# Altium PCB 对射式传感器_计数传感器.PcbDoc
Units mm, origin at the board's own origin, x right, y up, seen from the top; angles counter-clockwise.
Board outline 152.4 x 101.6 mm, 2 copper layers (Top Layer, Bottom Layer); 16 components, 7 nets, 45 pads, 2 vias.
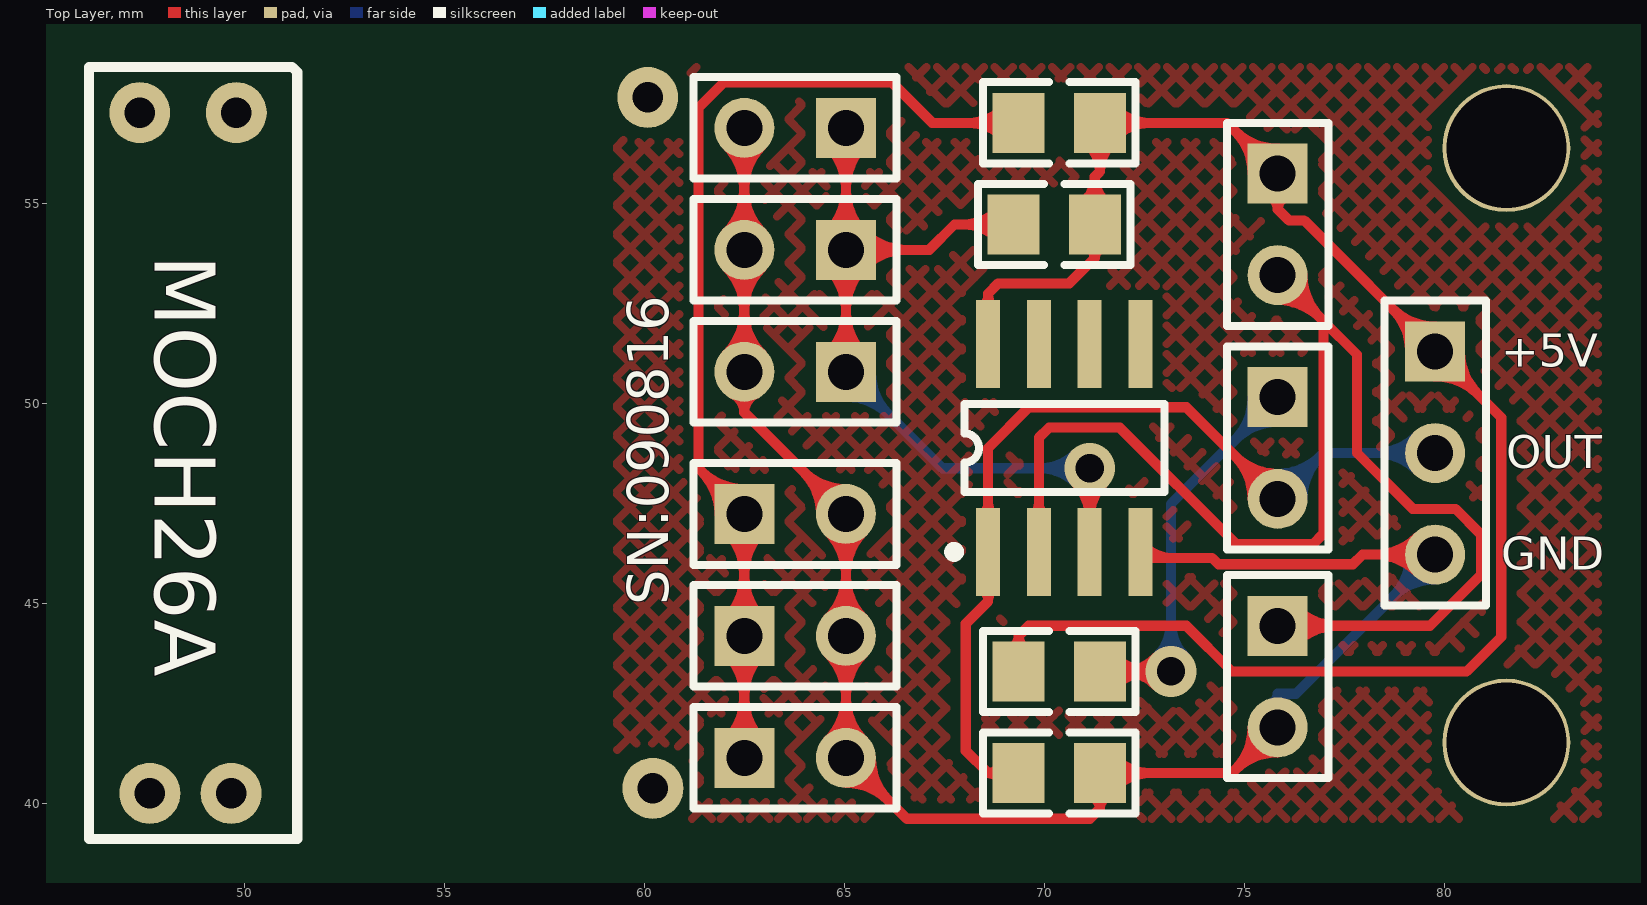
[diagram p0: Top Layer view]
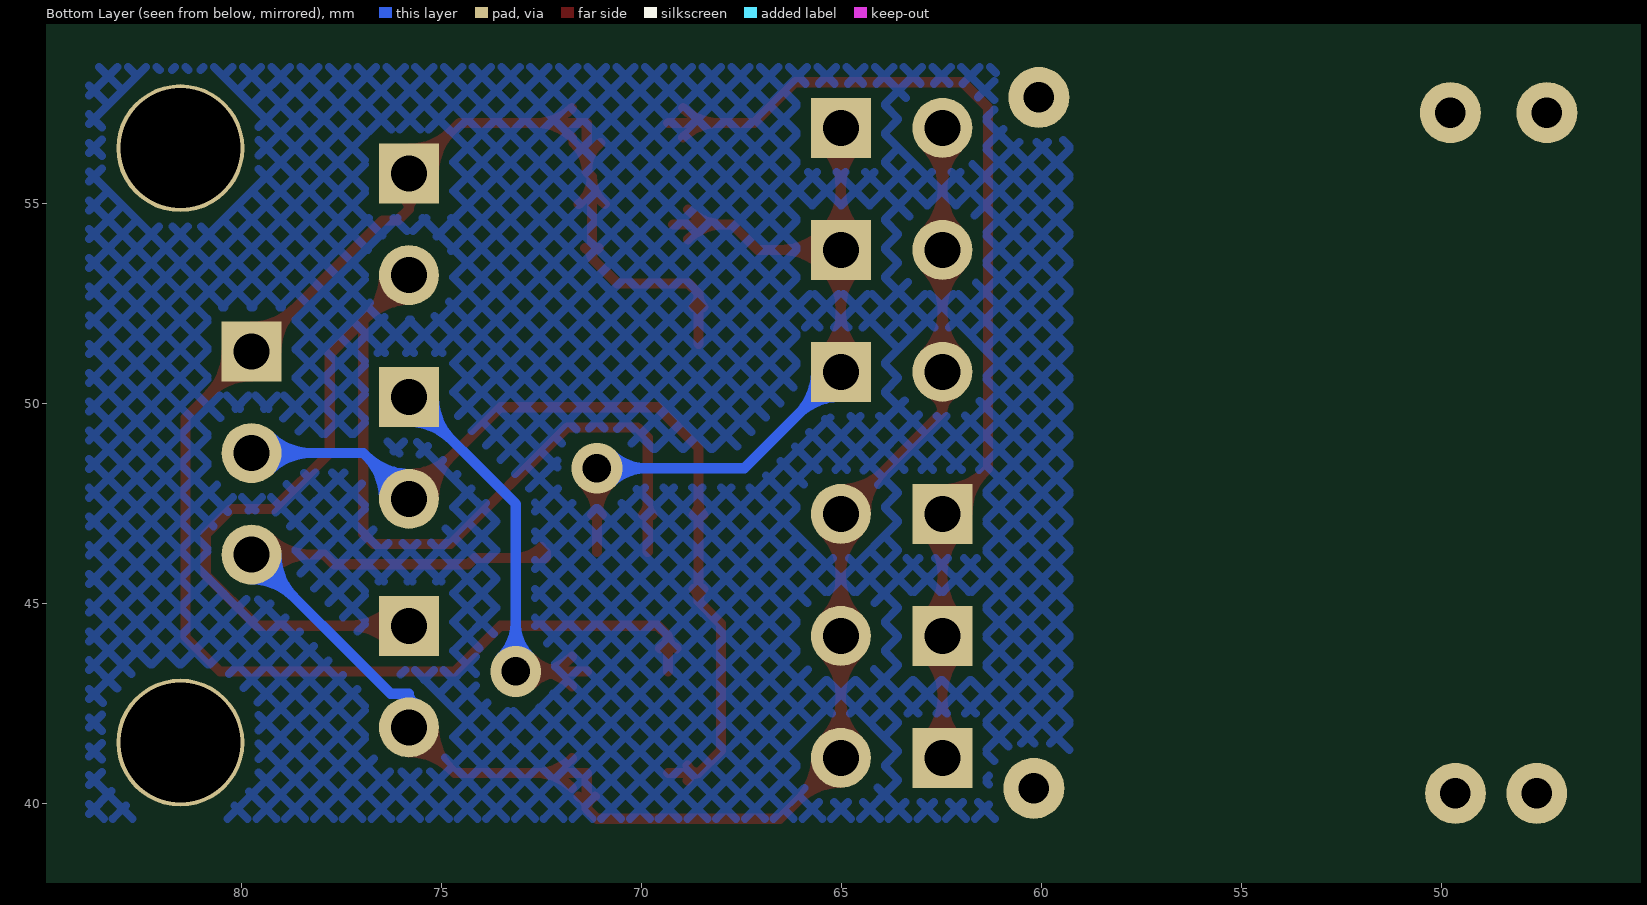
[diagram p1: Bottom Layer view, seen from below]

## Layer stack, top to bottom
Top Layer: signal copper 0.0356
Dielectric: dielectric 0.32, FR-4, Dk 4.8
Bottom Layer: signal copper 0.0356

## Board outline
25.4,25.4 177.8,25.4 177.8,127 25.4,127

## Design rules (kind name [scope] priority, off if disabled: settings)
Clearance [All] p1: gap=0.254
ComponentClearance [All] p1: gap=0.254 collisioncheckmode=3 verticalgap=0.254
PolygonConnect [All] p1: connectstyle=Relief reliefconductorwidth=0.254 reliefentries=4 polygonreliefangle="90 Angle"
RoutingVias [All] p1: holewidth=0.711 width=1.27 viastyle="Through Hole" minholewidth=0.711 minwidth=1.27 maxholewidth=0.711 maxwidth=1.27
SolderMaskExpansion [All] p1: expansion=0.102
TestPointUsage [All] p1: valid=0 allowmultiple=FALSE
Testpoint [All] p1: side=15 testpointundercomponent=TRUE minsize=1.016 maxsize=2.54 preferedsize=1.524 minholesize=0 maxholesize=1.016 preferedholesize=0.813 testpointgrid=0.025 style=1023 order=0-112345678
Width [All] p1: maxlimit=0.254 minlimit=0.254 preferedwidth=0.254
17 further rules are at their usual default settings.

## Components (designator, comment, footprint, x,y, rotation, side; value= is the part's Value field where it differs from the comment)
+5V "Header 3" HDR1X3 79.756,51.308 r270 top (schematic designator JP1)
C1 "" TP-0805-R 67.818,42.037 r180 top
GND "" HDR1X2 75.819,50.165 r270 top (schematic designator LED1)
JX-359F1 "" HDR1X2 62.484,41.148 r0 top
JX-359F1 "" HDR1X2 62.484,44.196 r0 top
JX-359F1 "" HDR1X2 62.484,47.244 r0 top
JX-359F2 "" HDR1X2 65.024,56.896 r180 top
JX-359F2 "" HDR1X2 65.024,53.848 r180 top
JX-359F2 "" HDR1X2 65.024,50.8 r180 top
LED1 "" HDR1X2 75.819,44.45 r270 top
MOCH26A "传感器" MOCH26A 47.752,41.148 r180 top
OUT "" HDR1X2 75.819,55.753 r270 top (schematic designator LED1)
R1 "" TP-0805-R 72.898,55.753 r0 top
R2 "" TP-0805-R 72.771,53.213 r0 top
R4 "" TP-0805-R 67.818,44.577 r180 top
U1 "LM393AD" SO8 70.485,48.895 r0 top

## Footprints (in the part's own frame and the unit in brackets; to place one, negate y for a bottom-side part, rotate by r counter-clockwise, add the part's x,y. Pads: shape width x height; smd on the part's side, far side on the other; paste and mask are expansions set on the pad)
HDR1X2 [mm] "Connector; Header; 2 Position"
  rect 1.5x1.5 hole 0.9: 1(0,0)
  round 1.5 hole 0.9: 2(2.54,0)
  silkscreen extent -1.27,-1.27 3.81,1.27
HDR1X3 [mm] "Connector; Header; 3 Position"
  rect 1.5x1.5 hole 0.9: 1(0,0)
  round 1.5 hole 0.9: 2(2.54,0) 3(5.08,0)
  silkscreen extent -1.27,-1.27 6.35,1.27
MOCH26A [mil]
  round 60 hole 30: 1(5,35) 2(-75,35) 3(-80,-635) 4(15,-635)
  silkscreen extent -140,-680 65,80
SO8 [mm] "Small Outline; 8 Leads; Body Width 3.9 mm; Pitch 1.27 mm"
  rect 0.6x2.2 smd: 1(-1.905,-2.6) 2(-0.635,-2.6) 3(0.635,-2.6) 4(1.905,-2.6) 5(1.905,2.6) 6(0.635,2.6) 7(-0.635,2.6) 8(-1.905,2.6)
  silkscreen extent -2.88,-2.72 2.5,1.1
TP-0805-R [mm] "贴片0805"
  rect 1.3x1.5 smd: 1(-3.556,1.27) 2(-1.524,1.27)
  silkscreen extent -4.44,0.25 -0.64,2.29

## Part data
+5V: "Header, 3-Pin"
C1: library part "Cap Semi", "Capacitor (Semiconductor SIM Model)"
GND JX-359F1 JX-359F1 JX-359F1 LED1 OUT: library part LED3, "Typical BLUE SiC LED"
JX-359F2 JX-359F2 JX-359F2: library part "Photo Sen", "Photosensitive Diode"
R1 R2 R4: library part Res2, "Resistor"
U1: "Low-Power Dual Voltage Comparator"

## Free pads (board coordinates)
  round 3.2 hole 3: 0(81.534,41.529) 0(81.534,56.388)
  round 1.524 hole 0.762: 2(60.071,57.658) 3(60.198,40.386)

## Via types
v1: diameter 1.27, hole 0.711, Top Layer to Bottom Layer, 2 vias

## Nets (pads, with @x,y where several pads share a name; then routed paths per layer and width w, separated by ;. In a path a pad name is that pad's centre, name@x,y a point inside that pad or via, vN(x,y) a via of type N, cw(c..) or ccw(c..) an arc to the next point about the centre after c; other vN are vias at no path point)
GND: +5V.3 C1.1 JX-359F1.2 JX-359F2.2 LED1.2 U1.4 | length 97.8
  Top Layer w0.254: JX-359F2.2@62.043,51.241 ccw(c60.98,52.304) 62.484,52.304 ccw(c63.988,52.304) JX-359F2.2@62.925,51.241 ; JX-359F2.2@62.043,53.407 cw(c60.98,52.344) 62.484,52.344 cw(c63.988,52.344) JX-359F2.2@62.925,53.407 ; JX-359F2.2@62.043,54.289 ccw(c60.98,55.352) 62.484,55.352 ccw(c63.988,55.352) JX-359F2.2@62.925,54.289 ; JX-359F2.2@62.043,56.455 cw(c60.98,55.392) 62.484,55.392 cw(c63.988,55.392) JX-359F2.2@62.925,56.455 ; JX-359F2.2@62.201,50.245 cw(c61.967,49.784) 62.484,49.784 ; JX-359F2.2@62.223,51.061 ccw(c61.593,51.691) 62.484,51.691 ccw(c63.375,51.691) JX-359F2.2@62.745,51.061 ; JX-359F2.2@62.223,53.587 cw(c61.593,52.957) 62.484,52.957 cw(c63.375,52.957) JX-359F2.2@62.745,53.587 ; JX-359F2.2@62.223,54.109 ccw(c61.593,54.739) 62.484,54.739 ccw(c63.375,54.739) JX-359F2.2@62.745,54.109 ; JX-359F2.2@62.223,56.635 cw(c61.593,56.005) 62.484,56.005 cw(c63.375,56.005) JX-359F2.2@62.745,56.635 ; JX-359F2.2@62.484,56.896 62.484,53.848 62.484,50.8 62.484,49.784 ; JX-359F2.2@62.767,50.245 ccw(c63.001,49.784) 62.484,49.784 ; JX-359F1.2@64.401,47.244 ccw(c62.897,47.244) 63.96,48.308 ccw(c65.024,49.371) JX-359F1.2@65.024,47.867 ; JX-359F1.2@64.583,41.589 ccw(c63.52,42.652) 65.024,42.652 ccw(c66.528,42.652) JX-359F1.2@65.465,41.589 ; JX-359F1.2@64.583,43.755 cw(c63.52,42.692) 65.024,42.692 cw(c66.528,42.692) JX-359F1.2@65.465,43.755 ; JX-359F1.2@64.583,44.637 ccw(c63.52,45.7) 65.024,45.7 ccw(c66.528,45.7) JX-359F1.2@65.465,44.637 ; JX-359F1.2@64.583,46.803 cw(c63.52,45.74) 65.024,45.74 cw(c66.528,45.74) JX-359F1.2@65.465,46.803 ; JX-359F1.2@64.655,47.244 ccw(c63.764,47.244) 64.394,47.874 ccw(c65.024,48.504) JX-359F1.2@65.024,47.613 ; JX-359F1.2@64.763,41.409 ccw(c64.133,42.039) 65.024,42.039 ccw(c65.915,42.039) JX-359F1.2@65.285,41.409 ; JX-359F1.2@64.763,43.935 cw(c64.133,43.305) 65.024,43.305 cw(c65.915,43.305) JX-359F1.2@65.285,43.935 ; JX-359F1.2@64.763,44.457 ccw(c64.133,45.087) 65.024,45.087 ccw(c65.915,45.087) JX-359F1.2@65.285,44.457 ; JX-359F1.2@64.763,46.983 cw(c64.133,46.353) 65.024,46.353 cw(c65.915,46.353) JX-359F1.2@65.285,46.983 ; JX-359F1.2@65.024,40.525 cw(c65.024,39.021) 66.088,40.084 cw(c67.151,41.148) JX-359F1.2@65.647,41.148 ; JX-359F1.2@65.024,40.779 cw(c65.024,39.888) 65.654,40.518 cw(c66.284,41.148) JX-359F1.2@65.393,41.148 ; C1.1@71.17,40.185 cw(c71.04,39.878) 71.374,39.878 ; C1.1@71.578,40.185 ccw(c71.708,39.878) 71.374,39.878 ; C1.1@71.744,40.397 cw(c72.637,39.504) 72.637,40.767 cw(c72.637,42.03) C1.1@71.744,41.137 ; U1.4 72.39,46.146 74.18,46.146 74.34,45.986 77.697,45.986 77.939,46.228 +5V.3 ; U1.4@72.512,46.417 ccw(c73.168,47.073) 73.168,46.146 ; LED1.2@75.196,41.91 cw(c73.692,41.91) 74.755,40.846 cw(c75.819,39.783) LED1.2@75.819,41.287 ; LED1.2@75.45,41.91 cw(c74.559,41.91) 75.189,41.28 cw(c75.819,40.65) LED1.2@75.819,41.541 ; LED1.2 74.676,40.767 C1.1 71.374,39.878 ; +5V.3@79.315,45.787 ccw(c78.252,44.724) 78.252,46.228 ccw(c78.252,47.732) +5V.3@79.315,46.669 ; +5V.3@79.495,45.967 ccw(c78.865,45.337) 78.865,46.228 ccw(c78.865,47.119) +5V.3@79.495,46.489 ; 62.484,49.784 65.024,47.244 65.024,44.196 65.024,41.148 66.548,39.624 71.12,39.624 71.374,39.878
  Bottom Layer w0.254: LED1.2@75.639,42.507 ccw(c75.567,42.748) 75.819,42.748 ; LED1.2 75.819,42.748 ; LED1.2@75.999,42.507 cw(c76.071,42.748) 75.819,42.748 ; +5V.3@79.133,46.228 cw(c77.629,46.228) 78.692,45.164 cw(c79.756,44.101) +5V.3@79.756,45.605 ; +5V.3@79.387,46.228 cw(c78.496,46.228) 79.126,45.598 cw(c79.756,44.968) +5V.3@79.756,45.859 ; +5V.3 76.276,42.748 75.819,42.748
NetC1_2: +5V.2 C1.2 GND.2 U1.1 | length 35.7
  Top Layer w0.254: U1.1@68.458,45.373 cw(c68.162,45.077) 68.58,45.077 cw(c68.998,45.077) U1.1@68.702,45.373 ; U1.1@68.458,47.217 ccw(c68.162,47.513) 68.58,47.513 ccw(c68.998,47.513) U1.1@68.702,47.217 ; C1.2@68.854,40.579 ccw(c68.58,40.473) 68.58,40.767 ; C1.2@68.854,40.955 cw(c68.58,41.061) 68.58,40.767 ; C1.2 68.58,40.767 ; GND.2@75.196,47.625 ccw(c73.692,47.625) 74.755,48.689 ccw(c75.819,49.752) GND.2@75.819,48.248 ; GND.2@75.45,47.625 ccw(c74.559,47.625) 75.189,48.255 ccw(c75.819,48.885) GND.2@75.819,47.994 ; GND.2 73.533,49.911 69.596,49.911 68.58,48.895 U1.1 68.58,45.06 68.021,44.501 68.021,41.326 68.58,40.767
  Bottom Layer w0.254: GND.2 76.962,48.768 +5V.2 ; GND.2@75.819,47.994 ccw(c75.819,48.885) 76.449,48.255 ccw(c77.079,47.625) GND.2@76.188,47.625 ; GND.2@75.819,48.248 ccw(c75.819,49.752) 76.883,48.689 ccw(c77.946,47.625) GND.2@76.442,47.625 ; +5V.2@79.315,48.327 ccw(c78.252,47.264) 78.252,48.768 ccw(c78.252,50.272) +5V.2@79.315,49.209 ; +5V.2@79.495,48.507 ccw(c78.865,47.877) 78.865,48.768 ccw(c78.865,49.659) +5V.2@79.495,49.029
NetJX-359F1_1: JX-359F1.1 R1.1 | length 46.2
  Top Layer w0.254: JX-359F1.1@61.861,47.244 ccw(c60.357,47.244) 61.42,48.308 ccw(c62.484,49.371) JX-359F1.1@62.484,47.867 ; JX-359F1.1@62.043,41.589 ccw(c60.98,42.652) 62.484,42.652 ccw(c63.988,42.652) JX-359F1.1@62.925,41.589 ; JX-359F1.1@62.043,43.755 cw(c60.98,42.692) 62.484,42.692 cw(c63.988,42.692) JX-359F1.1@62.925,43.755 ; JX-359F1.1@62.043,44.637 ccw(c60.98,45.7) 62.484,45.7 ccw(c63.988,45.7) JX-359F1.1@62.925,44.637 ; JX-359F1.1@62.043,46.803 cw(c60.98,45.74) 62.484,45.74 cw(c63.988,45.74) JX-359F1.1@62.925,46.803 ; JX-359F1.1@62.115,47.244 ccw(c61.224,47.244) 61.854,47.874 ccw(c62.484,48.504) JX-359F1.1@62.484,47.613 ; JX-359F1.1@62.223,41.409 ccw(c61.593,42.039) 62.484,42.039 ccw(c63.375,42.039) JX-359F1.1@62.745,41.409 ; JX-359F1.1@62.223,43.935 cw(c61.593,43.305) 62.484,43.305 cw(c63.375,43.305) JX-359F1.1@62.745,43.935 ; JX-359F1.1@62.223,44.457 ccw(c61.593,45.087) 62.484,45.087 ccw(c63.375,45.087) JX-359F1.1@62.745,44.457 ; JX-359F1.1@62.223,46.983 cw(c61.593,46.353) 62.484,46.353 cw(c63.375,46.353) JX-359F1.1@62.745,46.983 ; JX-359F1.1@62.484,41.148 62.484,44.196 62.484,47.244 61.341,48.387 61.341,57.404 61.976,58.039 66.167,58.039 67.183,57.023 R1.1 ; R1.1@68.972,56.653 ccw(c68.079,55.76) 68.079,57.023 ccw(c68.079,58.286) R1.1@68.972,57.393
NetJX-359F2_1: JX-359F2.1 R2.1 U1.3 | length 48.8
  Top Layer w0.254: JX-359F2.1@64.583,51.241 ccw(c63.52,52.304) 65.024,52.304 ccw(c66.528,52.304) JX-359F2.1@65.465,51.241 ; JX-359F2.1@64.583,53.407 cw(c63.52,52.344) 65.024,52.344 cw(c66.528,52.344) 65.465,53.407 cw(c66.528,52.344) 66.528,53.848 cw(c66.528,55.352) 65.465,54.289 cw(c66.528,55.352) 65.024,55.352 cw(c63.52,55.352) JX-359F2.1@64.583,54.289 ; JX-359F2.1@64.583,56.455 cw(c63.52,55.392) 65.024,55.392 cw(c66.528,55.392) JX-359F2.1@65.465,56.455 ; JX-359F2.1@64.763,51.061 ccw(c64.133,51.691) 65.024,51.691 ccw(c65.915,51.691) JX-359F2.1@65.285,51.061 ; JX-359F2.1@64.763,53.587 cw(c64.133,52.957) 65.024,52.957 cw(c65.915,52.957) 65.285,53.587 cw(c65.915,52.957) 65.915,53.848 cw(c65.915,54.739) 65.285,54.109 cw(c65.915,54.739) 65.024,54.739 cw(c64.133,54.739) JX-359F2.1@64.763,54.109 ; JX-359F2.1@64.763,56.635 cw(c64.133,56.005) 65.024,56.005 cw(c65.915,56.005) JX-359F2.1@65.285,56.635 ; JX-359F2.1@65.024,50.8 JX-359F2.1@65.024,53.848 ; JX-359F2.1@65.024,56.896 JX-359F2.1@65.024,53.848 ; R2.1@68.845,54.113 ccw(c67.952,53.22) 67.952,54.483 ccw(c67.952,55.746) R2.1@68.845,54.853 ; R2.1 67.742,54.483 67.107,53.848 JX-359F2.1@65.024,53.848 ; v1@70.761,48.028 cw(c69.894,47.161) 71.12,47.161 cw(c72.346,47.161) v1@71.479,48.028 ; U1.3@70.998,47.217 ccw(c70.702,47.513) 71.12,47.513 ccw(c71.538,47.513) U1.3@71.242,47.217 ; U1.3 v1(71.12,48.387)
  Bottom Layer w0.254: JX-359F2.1@65.024,50.177 cw(c65.024,48.673) 66.088,49.736 cw(c67.151,50.8) JX-359F2.1@65.647,50.8 ; JX-359F2.1@65.024,50.431 cw(c65.024,49.54) 65.654,50.17 cw(c66.284,50.8) JX-359F2.1@65.393,50.8 ; JX-359F2.1@65.024,50.8 67.437,48.387 v1(71.12,48.387) ; v1@70.761,48.028 ccw(c69.894,47.161) 69.894,48.387 ccw(c69.894,49.613) v1@70.761,48.746
NetLED1_1: GND.1 R4.1 | length 19.3
  Top Layer w0.254: R4.1 v1(73.152,43.307) ; R4.1@71.744,42.937 cw(c72.637,42.044) 72.637,43.307 cw(c72.637,44.57) R4.1@71.744,43.677 ; v1@72.793,42.948 ccw(c71.926,42.081) 71.926,43.307 ccw(c71.926,44.533) v1@72.793,43.666
  Bottom Layer w0.254: v1@72.793,43.666 ccw(c71.926,44.533) 73.152,44.533 ccw(c74.378,44.533) v1@73.511,43.666 ; v1(73.152,43.307) 73.152,47.498 GND.1 ; GND.1@75.196,50.165 cw(c73.692,50.165) 74.755,49.101 cw(c75.819,48.038) GND.1@75.819,49.542 ; GND.1@75.45,50.165 cw(c74.559,50.165) 75.189,49.535 cw(c75.819,48.905) GND.1@75.819,49.796
NetR3_3: LED1.1 OUT.2 U1.2 | length 40.7
  Top Layer w0.254: U1.2@69.728,47.217 ccw(c69.432,47.513) 69.85,47.513 ccw(c70.268,47.513) U1.2@69.972,47.217 ; U1.2 69.85,49.149 70.104,49.403 71.872,49.403 74.781,46.494 76.708,46.494 76.962,46.748 76.962,52.07 ; LED1.1 79.629,44.45 80.899,45.72 80.899,46.736 80.264,47.371 79.197,47.371 77.8,48.768 77.8,51.232 76.962,52.07 ; OUT.2@75.819,52.59 cw(c75.819,51.086) 76.883,52.149 cw(c77.946,53.213) OUT.2@76.442,53.213 ; OUT.2@75.819,52.844 cw(c75.819,51.953) 76.449,52.583 cw(c77.079,53.213) OUT.2@76.188,53.213 ; OUT.2 76.962,52.07 ; LED1.1@76.08,44.189 cw(c76.71,43.559) 76.71,44.45 cw(c76.71,45.341) LED1.1@76.08,44.711 ; LED1.1@76.26,44.009 cw(c77.323,42.946) 77.323,44.45 cw(c77.323,45.954) LED1.1@76.26,44.891
VCC: +5V.1 OUT.1 R1.2 R2.2 R4.2 U1.8 | length 60.1
  Top Layer w0.254: U1.8@68.458,52.417 ccw(c68.162,52.713) 68.58,52.713 ccw(c68.998,52.713) U1.8@68.702,52.417 ; U1.8 68.58,52.756 68.834,53.01 70.612,53.01 71.247,53.645 ; R4.2@69.138,43.889 ccw(c69.008,44.196) 69.342,44.196 ; R4.2 69.342,44.196 ; R4.2@69.546,43.889 cw(c69.676,44.196) 69.342,44.196 ; R2.2@70.919,54.99 ccw(c70.365,55.677) 71.247,55.677 ; R1.2@71.038,56.522 cw(c70.438,55.804) 71.374,55.804 ; R2.2@71.074,53.89 cw(c70.988,53.645) 71.247,53.645 ; R2.2@71.42,53.89 ccw(c71.506,53.645) 71.247,53.645 ; R2.2@71.575,54.99 cw(c72.129,55.677) 71.247,55.677 ; R1.2@71.71,56.522 ccw(c72.31,55.804) 71.374,55.804 ; R1.2@71.744,56.653 cw(c72.637,55.76) 72.637,57.023 cw(c72.637,58.286) R1.2@71.744,57.393 ; OUT.1@75.196,55.753 ccw(c73.692,55.753) 74.755,56.817 ccw(c75.819,57.88) OUT.1@75.819,56.376 ; OUT.1@75.45,55.753 ccw(c74.559,55.753) 75.189,56.383 ccw(c75.819,57.013) OUT.1@75.819,56.122 ; OUT.1@75.606,55.167 cw(c75.496,54.864) 75.819,54.864 ; OUT.1@76.032,55.167 ccw(c76.142,54.864) 75.819,54.864 ; +5V.1@79.133,51.308 ccw(c77.629,51.308) 78.692,52.372 ccw(c79.756,53.435) +5V.1@79.756,51.931 ; +5V.1@79.387,51.308 ccw(c78.496,51.308) 79.126,51.938 ccw(c79.756,52.568) +5V.1@79.756,51.677 ; +5V.1@79.756,50.685 cw(c79.756,49.181) 80.82,50.244 cw(c81.883,51.308) +5V.1@80.379,51.308 ; +5V.1@79.756,50.939 cw(c79.756,50.048) 80.386,50.678 cw(c81.016,51.308) +5V.1@80.125,51.308 ; 69.342,44.196 69.596,44.45 73.533,44.45 74.676,43.307 80.543,43.307 81.407,44.171 81.407,49.657 +5V.1 76.479,54.585 76.098,54.585 75.819,54.864 ; 71.247,53.645 R2.2 71.247,55.677 ; 71.247,55.677 71.374,55.804 ; 71.374,55.804 R1.2 74.549,57.023 OUT.1 75.819,54.864
pads on no net: MOCH26A.1 MOCH26A.2 MOCH26A.3 MOCH26A.4 U1.5 U1.6 U1.7

## Polygon pours and split planes (outlines as drawn)
no net on Top Layer (hatched 45Degree grid 0.508 track 0.203): 59.309,58.42 59.309,39.624 83.82,39.624 83.82,58.42
no net on Bottom Layer (hatched 45Degree grid 0.508 track 0.203): 59.309,56.642 59.309,39.624 83.82,39.624 83.82,58.42 59.309,58.42

## Silkscreen, mask and mechanical layers (free items; w line width, h text height)
Top Overlay:
  text "SN:090816" at 60.579,44.958 h1.02 r90
Mechanical 1:
  lines w0.254: 55.477,60.442 55.987,58.919 ; 55.502,45.846 56.007,47.371 ; 55.733,58.918 56.241,58.919 ; 55.753,47.371 56.261,47.371 ; 55.983,61.459 55.987,58.919 ; 56.011,44.831 56.007,47.371 ; 56.493,60.444 55.987,58.919 ; 56.518,45.848 56.007,47.371 ; 58.547,61.595 58.547,62.103 ; 60.071,61.341 58.547,61.849 ; 60.071,62.357 58.547,61.849 ; 66.906,61.849 58.547,61.849 ; 82.954,61.849 91.313,61.849 ; 89.789,61.341 91.313,61.849 ; 89.789,62.357 91.313,61.849 ; 91.313,61.595 91.313,62.103 ; 58.928,39.116 84.201,39.116 84.201,58.928 58.928,58.928 58.928,39.116
  text "11.5479 (mm)" at 52.327,61.417 h1.52 r270.1
  text "32.766 (mm)" at 67.16,60.935 h1.52